# EAGLE board Whale_Engine-REVB_eagle (EAGLE 9.5.2)
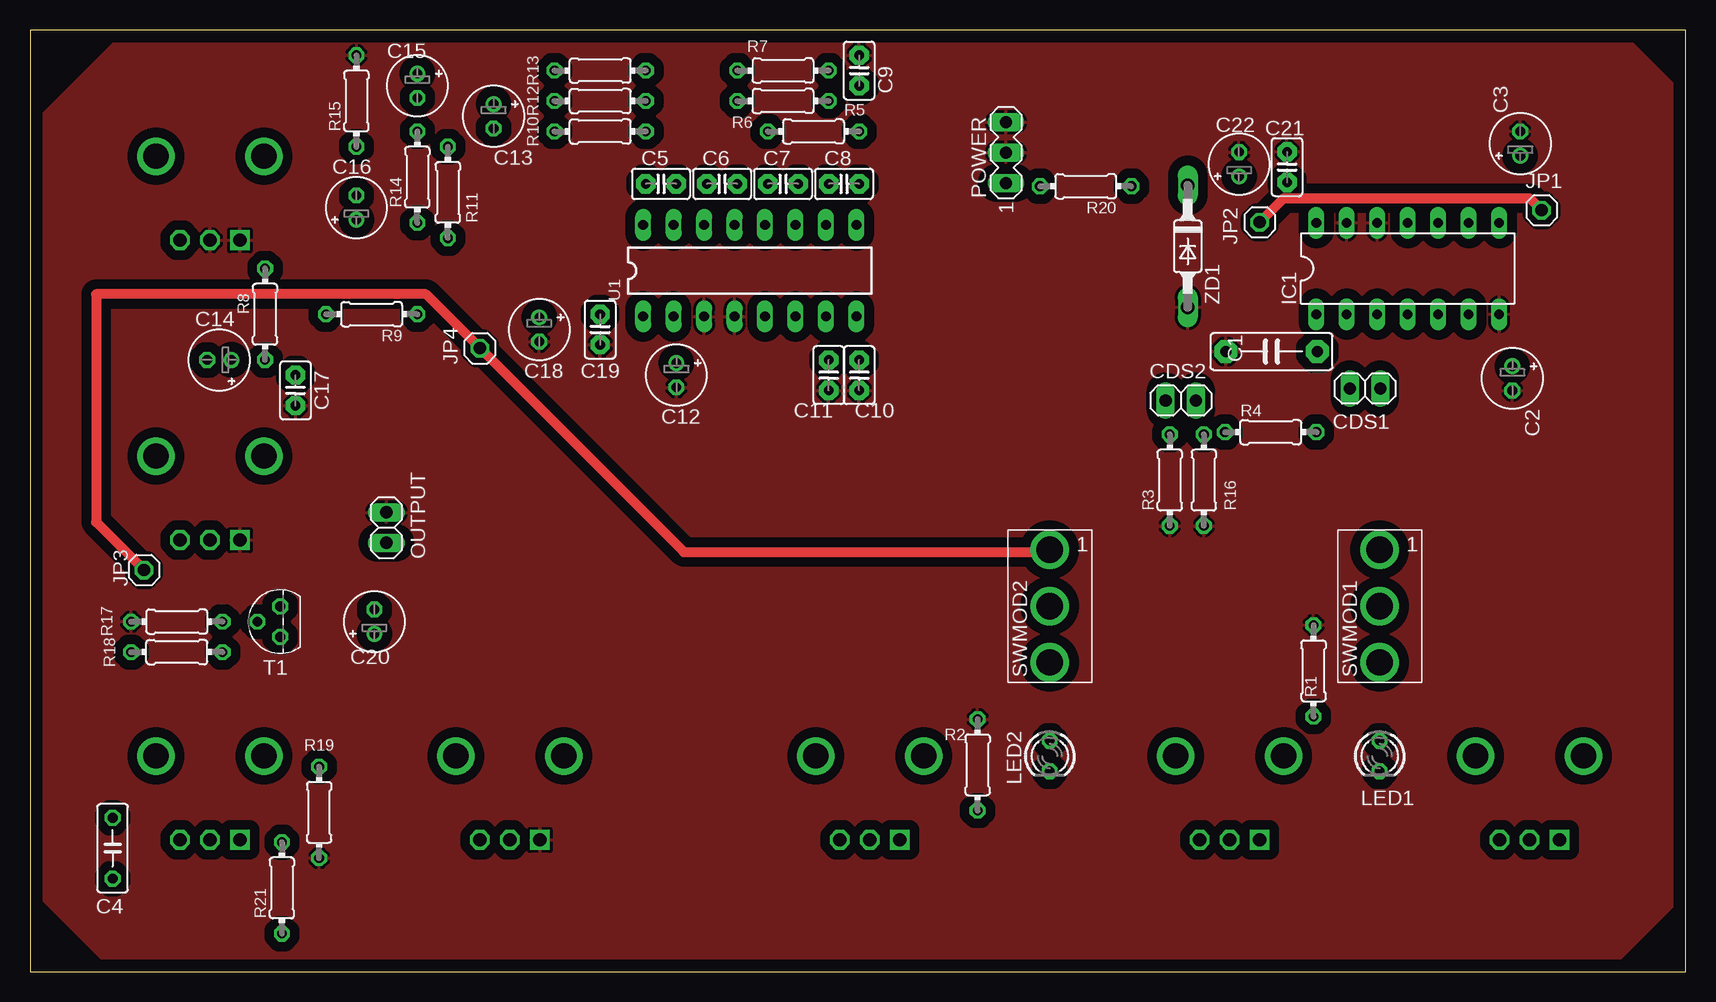
[diagram p0: board, top side]
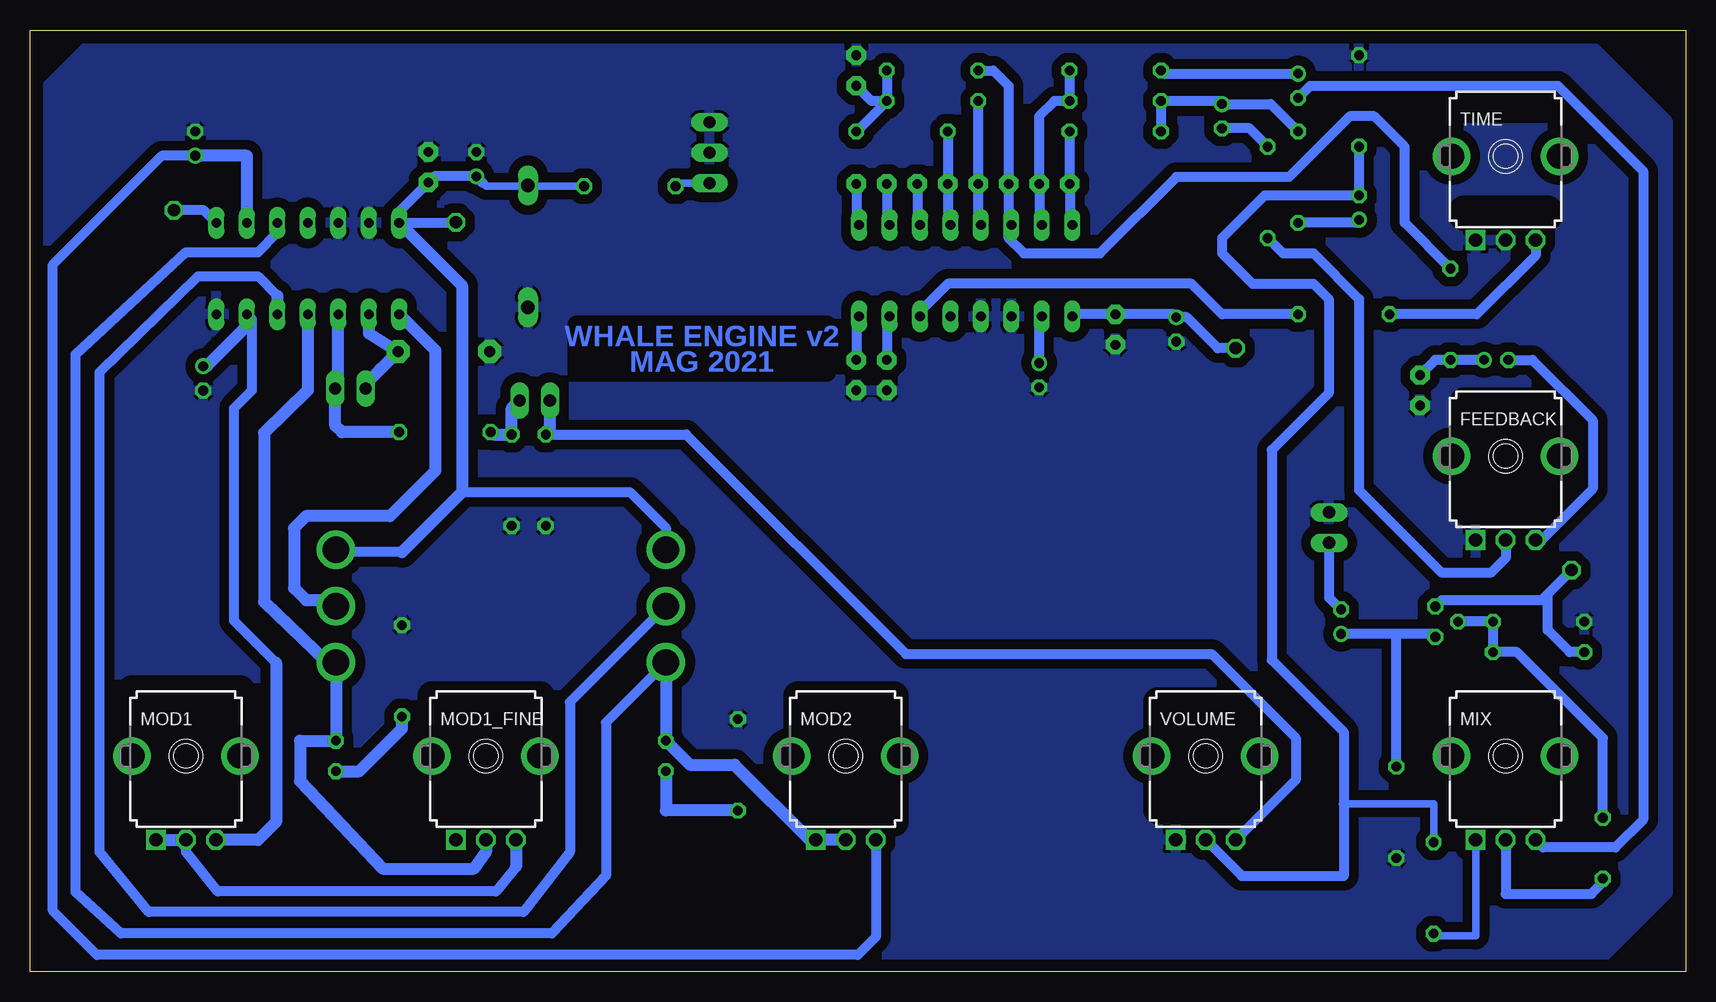
[diagram p1: board, bottom side, seen from below]

Size 138 x 78.53 mm. Coordinates in mm from the lower left corner, seen from the top.
Outline: 0,0 138,0 138,78.53 0,78.53 0,0
Copper layers (1*16): Top 0.035mm / dielectric 1.5mm / Bottom 0.035mm
Design rules "default": minimum track width 6mil, minimum drill 0.35mm, track to track 6mil, track to pad 6mil, pad to pad 6mil, via to via 6mil, smd to smd 6mil, copper to edge 40mil, drill to drill 6mil, minimum pad ring 10mil, minimum via ring 8mil, stop-mask expansion 4mil, vias tented up to drill 0mil, thermal gap 10mil
bRestrict: area 120.5,12.5 to 129.5,23.5; area 95.5,12.5 to 104.5,23; area 66,12.5 to 74,23; area 36,13.5 to 44,22.5; area 11,12.5 to 19,23; area 11,38.5 to 18.5,47.5; area 11.5,63 to 18.5,63.5; area 11,72 to 19,72.5

## Footprints (pad centres in the part's own frame; a part is rotated, then mirrored left to right if it is on the bottom)
C7.5B3 = drill 0.914 pad 1.905 octagon: 1 -3.81,0; 2 3.81,0
E2-5 = drill 0.813 pad 1.27: + -1.016,0 | drill 0.813 pad 1.27 octagon: - 1.016,0
C050-025X075 = drill 0.813 octagon: 1 -2.54,0; 2 2.54,0
C2.5-2 = drill 0.813 pad 1.6 octagon: 1 -1.27,0; 2 1.27,0
1X02 = drill 1.016 long: 1 -1.27,0; 2 1.27,0
9MM_SNAP-IN_POT = drill 1.1 square: 1 -2.5,-7 | drill 1.1 octagon: 2 0,-7; 3 2.5,-7 | drill 2.1 pad 2.794: CHASSIS1 -4.5,0; CHASSIS2 4.5,0
DIL14 = drill 0.813 long: 1 -7.62,-3.81; 2 -5.08,-3.81; 3 -2.54,-3.81; 4 0,-3.81; 5 2.54,-3.81; 6 5.08,-3.81; 7 7.62,-3.81; 8 7.62,3.81; 9 5.08,3.81; 10 2.54,3.81; 11 0,3.81; 12 -2.54,3.81; 13 -5.08,3.81; 14 -7.62,3.81
1X01 = drill 1.016 octagon: 1 0,0
LED3MM = drill 0.813 octagon: A -1.27,0; K 1.27,0
MA03-1 = drill 1.016 long: 1 -2.54,0; 2 0,0; 3 2.54,0
0204/7 = drill 0.813 octagon: 1 -3.81,0; 2 3.81,0
C&K_SPDT_PCB = drill 2.2: P$1 0,4.7; P$2 0,0; P$3 0,-4.7
TO92 = drill 0.813 octagon: 1 1.27,0; 2 0,1.905; 3 -1.27,0
DIL16 = drill 0.813 long: 1 -8.89,-3.81; 2 -6.35,-3.81; 3 -3.81,-3.81; 4 -1.27,-3.81; 5 1.27,-3.81; 6 3.81,-3.81; 7 6.35,-3.81; 8 8.89,-3.81; 9 8.89,3.81; 10 6.35,3.81; 11 3.81,3.81; 12 1.27,3.81; 13 -1.27,3.81; 14 -3.81,3.81; 15 -6.35,3.81; 16 -8.89,3.81
SOD81 = drill 1.118 long: A 5.08,0; C -5.08,0

## Placement (x,y rotation side)
C1  470nF  [C7.5B3]  103.49,51.72 180 top
C2  10uF  [E2-5]  123.56,49.48 270 top
C3  47uF  [E2-5]  124.22,69.06 90 top
C4  100nF  [C050-025X075]  6.89,10.31 90 top
C5  560pF  [C2.5-2]  52.6,65.7 0 top
C6  560pF  [C2.5-2]  57.69,65.7 0 top
C7  47nF  [C2.5-2]  62.77,65.7 0 top
C8  47nF  [C2.5-2]  67.85,65.7 0 top
C9  3.3nF  [C2.5-2]  69.12,75.15 90 top
C10  100nF  [C2.5-2]  69.12,49.75 270 top
C11  100nF  [C2.5-2]  66.58,49.75 270 top
C12  47uF  [E2-5]  53.88,49.75 270 top
C13  47uF  [E2-5]  38.64,71.34 270 top
C14  10uF  [E2-5]  15.78,51.02 180 top
C15  10uF  [E2-5]  32.29,73.88 270 top
C16  4.7uF  [E2-5]  27.21,63.72 90 top
C17  1nF  [C2.5-2]  22.13,48.48 270 top
C18  100uF  [E2-5]  42.45,53.56 270 top
C19  100nF  [C2.5-2]  47.53,53.56 90 top
C20  10uF  [E2-5]  28.71,29.2 90 top
C21  100nF  [C2.5-2]  104.79,67.1 90 top
C22  100uF  [E2-5]  100.79,67.34 90 top
CDS1  [1X02]  111.28,48.64 0 top
CDS2  [1X02]  95.93,47.64 0 top
FEEDBACK  10K  [9MM_SNAP-IN_POT]  15,43 0 bottom
IC1  4093N  [DIL14]  114.84,58.64 0 top
JP1  [1X01]  126,63.5 0 top
JP2  [1X01]  102.5,62.5 0 top
JP3  [1X01]  9.5,33.5 0 top
JP4  [1X01]  37.5,52 90 top
LED1  [LED3MM]  112.5,18 270 top
LED2  [LED3MM]  85,18 270 top
MIX  10-50K  [9MM_SNAP-IN_POT]  15,18 0 bottom
MOD1  100K  [9MM_SNAP-IN_POT]  125,18 0 bottom
MOD1_FINE  5K  [9MM_SNAP-IN_POT]  100,18 0 bottom
MOD2  100K  [9MM_SNAP-IN_POT]  70,18 0 bottom
OUTPUT  [1X02]  29.71,37.05 90 top
POWER  [MA03-1]  81.36,68.31 90 top
R1  1K  [0204/7]  106.99,25.1 270 top
R2  1K  [0204/7]  78.99,17.26 270 top
R3  22K  [0204/7]  95.01,41 90 top
R4  68k  [0204/7]  103.42,45 0 top
R5  10k  [0204/7]  65.31,70.07 180 top
R6  10k  [0204/7]  62.77,72.61 180 top
R7  15K  [0204/7]  62.77,75.15 180 top
R8  5.6K  [0204/7]  19.59,54.83 90 top
R9  2k  [0204/7]  28.48,54.83 180 top
R10  10k  [0204/7]  47.53,70.07 0 top
R11  5K  [0204/7]  34.83,64.99 90 top
R12  10k  [0204/7]  47.53,72.61 0 top
R13  4.7K  [0204/7]  47.53,75.15 0 top
R14  15K  [0204/7]  32.29,66.26 90 top
R15  100K  [0204/7]  27.21,72.61 90 top
R16  22K  [0204/7]  97.85,41 90 top
R17  220K  [0204/7]  12.24,29.2 180 top
R18  220K  [0204/7]  12.24,26.66 0 top
R19  3K3  [0204/7]  24.1,13.3 270 top
R20  100R  [0204/7]  88,65.5 180 top
R21  2-10K  [0204/7]  21,7 90 top
SWMOD1  SPDT_C&K_PCB  [C&K_SPDT_PCB]  112.5,30.5 0 top
SWMOD2  SPDT_C&K_PCB  [C&K_SPDT_PCB]  85,30.5 0 top
T1  2N3904  [TO92]  20.86,29.2 90 top
TIME  50K  [9MM_SNAP-IN_POT]  15,68 0 bottom
U1  PT2399  [DIL16]  60,58.46 0 top
VOLUME  10KA  [9MM_SNAP-IN_POT]  40,18 0 bottom
ZD1  4.7V Zener  [SOD81]  96.5,60.5 270 top

## Library data of the parts
C1 C5-C11 C17 C19 C21 = capacitor-wima
C2-C4 C12-C16 C18 C20 C22 = rcl; SPICEPREFIX: C
CDS1 CDS2 JP1-JP4 OUTPUT = pinhead
FEEDBACK MIX MOD1 MOD1_FINE MOD2 TIME VOLUME = MusicThingModular
IC1 = 40xx
LED1 LED2 = led
POWER = con-lstb; OC_FARNELL: unknown; OC_NEWARK: unknown
R1-R21 = rcl; SPICEPREFIX: R
SWMOD1 SWMOD2 = DACS
T1 = transistor
U1 = princeton-tech
ZD1 = diode

## Nets
+5V: C18.+ C19.2 C21.1 C22.+ IC1.8 IC1.14 JP1.1 JP2.1 JP3.1 JP4.1 R18.1 R20.1 SWMOD1.P$1 SWMOD2.P$1 T1.1 U1.1 ZD1.C
GND: C1.2 C2.- C3.- C9.2 C10.2 C11.2 C12.- C17.2 C18.- C19.1 C21.2 C22.- FEEDBACK.1 IC1.7 IC1.12 IC1.13 OUTPUT.2 POWER.2 POWER.3 R1.1 R2.1 R3.1 R15.2 R16.1 R17.2 R19.2 TIME.1 TIME.2 U1.3 U1.4 VOLUME.1 ZD1.A
N$1: IC1.1 SWMOD1.P$2
N$2: IC1.5 SWMOD2.P$2
N$3: C2.+ IC1.6 MOD1.3
N$4: MOD1.1 MOD1.2 MOD1_FINE.3
N$5: IC1.4 LED1.A MOD1_FINE.2 SWMOD1.P$3
N$6: IC1.10 LED2.A MOD2.1 MOD2.2 SWMOD2.P$3
N$7: C1.1 CDS1.1 IC1.2
N$8: CDS1.2 IC1.3 R4.2
N$9: LED1.K R1.2
N$10: LED2.K R2.2
N$11: C3.+ IC1.9 MOD2.3
N$12: CDS2.2 R4.1 R16.2
N$13: CDS2.1 R3.2 VOLUME.3
N$14: C5.1 R10.2 U1.16
N$15: C5.2 R12.2 R13.2 U1.15
N$16: C6.1 R7.2 R8.2 U1.14
N$17: C6.2 R6.2 U1.13
N$18: C7.1 R5.2 U1.12
N$19: C7.2 U1.11
N$20: C8.1 U1.10
N$21: C8.2 U1.9
N$22: C9.1 R5.1 R6.1 R7.1
N$23: C10.1 U1.8
N$24: C11.1 U1.7
N$25: R9.1 U1.6
N$26: R9.2 TIME.3
N$27: C4.2 R17.1 R18.2 T1.2
N$28: C12.+ U1.2
N$29: C13.+ R10.1 R12.1 R14.2
N$30: C13.- R11.2
N$31: FEEDBACK.2 R11.1
N$32: C14.- FEEDBACK.3
N$33: C14.+ C17.1 R8.1
N$34: C15.+ R13.1
N$35: C4.1 MIX.2
N$36: C16.+ R14.1
N$37: C20.+ R19.1 T1.3
N$38: C20.- OUTPUT.1
N$39: C15.- MIX.3
N$40: MIX.1 R21.1
N$41: POWER.1 R20.2
OSC_OUT: C16.- R15.1 R21.2 VOLUME.2

## Tracks (layer width: path | path; a pad name or v marks a point on that pad's centre or on a via)
+5V
  Top 0.813: JP3.1 5.5,37.5 5.5,56.5 33,56.5 JP4.1 54.5,35 84.8,35 SWMOD2.P$1 | JP2.1 104.5,64.5 125,64.5 JP1.1
  Bottom 0.61: R20.1 96.42,65.5 | 96.42,65.5 ZD1.C | 100.24,65.77 99.97,65.5 96.42,65.5
  Bottom 0.813: U1.1 50.93,54.83 C19.2 42.7,54.83 C18.+ 41.58,54.58 39,52 JP4.1 | JP2.1 102.55,62.45 IC1.14 107.22,63.4 C21.1 104.3,66.32 C22.+ 100.24,65.77 | IC1.8 123.51,63.5 JP1.1 | T1.1 20.33,31 12,31 JP3.1 11.5,31.5 11.5,28.5 9.66,26.66 R18.1 | 107,35 112.3,35 SWMOD1.P$1 | 102,40 88,40 85,37 SWMOD2.P$1
  Bottom 1.016: IC1.14 102,57.23 102,40 107,35
GND
  pour Bottom (isolate 0.813): 7.5,77 1.5,71 1.5,6.5 7,1 132.5,1 136.5,5 136.5,74 133.5,77
  pour Top (isolate 0.813): 1,71 1,71.5 7,77.5 133.5,77.5 137,74 137,5.5 132.5,1 6,1 1,6 1,6.5
N$1
  Bottom 1.016: IC1.1 104.22,51.83 104.22,41.78 108,38 115,38 116,37 116,32 115,31 113,31 SWMOD1.P$2
N$2
  Bottom 0.813: 117.38,56.38 119,58 124,58 132.2,50 132.2,10 128.09,5 96.86,5 93,10 93,22.5 SWMOD2.P$2
  Bottom 1.016: 117.38,56.38 IC1.5
N$3
  Bottom 0.813: 117.5,25.77 121,29.27 121,47 119.5,48.5 119.5,54.41 IC1.6
  Bottom 1.016: IC1.6 119.92,53.83 123.25,50.5 C2.+ | 117.5,25.77 117.5,12.5 119,11 MOD1.3
N$4
  Bottom 0.813: 97.5,8.76 99.16,6.7 122.34,6.7 125,10 MOD1.2
  Bottom 1.016: MOD1.1 MOD1.2 | MOD1_FINE.3 97.5,8.76
N$5
  Bottom 1.016: IC1.4 114.84,48.48 118.48,44.94 118.48,30.87 113.17,25.8 SWMOD1.P$3 LED1.A 115.5,19.27 115.5,15.9 108.6,8.6 101,8.6 100,10 MOD1_FINE.2
N$6
  Bottom 0.813: SWMOD2.P$3 90,20.8 90,8 94.5,3.2 130.4,3.2 134.2,6.67 134.2,51.47 125,60 119,60 117.38,61.62 IC1.10
  Bottom 1.016: SWMOD2.P$3 LED2.A 83,17.27 79.27,17.27 73,11 MOD2.1 MOD2.2
N$7
  Bottom 1.016: IC1.2 109.76,53.24 C1.1 108.78,50.26 110.01,49.03 CDS1.1
N$8
  Bottom 1.016: IC1.3 112.3,48.89 CDS1.2 112.55,45.55 112,45 R4.2
N$9
  Bottom 1.016: LED1.K 110.55,16.73 106.99,20.29 R1.2
N$10
  Bottom 1.016: R2.2 85,13.45 LED2.K
N$11
  Bottom 0.813: MOD2.3 67.5,2.92 69,1.42 132.42,1.42 136.1,5.1 136.1,58.96 127.01,68.04 C3.+
  Bottom 1.016: IC1.9 119.92,68.04 C3.+
N$12
  Bottom 1.016: R4.1 99.42,44.81 R16.2 97.85,46.99 CDS2.2
N$13
  Bottom 0.813: R3.2 83.31,44.81 65,26.5 39.5,26.5 32.5,19.5 32.5,16 VOLUME.3
  Bottom 1.016: R3.2 94.66,45.16 CDS2.1
N$14
  Bottom 0.813: U1.16 51.33,62.49 C5.1 R10.2
N$15
  Bottom 0.813: U1.15 53.87,62.49 C5.2 53.88,71.34 52.61,72.61 R12.2 R13.2
N$16
  Bottom 0.813: 56.42,62.5 C6.1 56.42,73.88 57.69,75.15 R7.2 | 56.42,62.5 U1.14 | 56.42,62.5 56.42,61.18 55.15,59.91 48.8,59.91 42.45,66.26 33.06,66.26 27.98,71.34 25.94,71.34 23.4,68.8 23.4,62.45 R8.2
N$17
  Bottom 0.813: U1.13 58.96,62.5 C6.2 R6.2
N$18
  Bottom 0.813: U1.12 61.5,62.5 C7.1 R5.2
N$19
  Bottom 0.813: C7.2 64.04,62.5 U1.11
N$20
  Bottom 0.813: C8.1 66.58,62.5 U1.10
N$21
  Bottom 0.813: C8.2 69.12,62.5 U1.9
N$22
  Bottom 0.813: R6.1 R5.1 | R7.1 R6.1 | R6.1 67.85,72.61 C9.1
N$23
  Bottom 0.813: U1.8 69.12,54.42 C10.1
N$24
  Bottom 0.813: U1.7 66.58,54.42 C11.1
N$25
  Bottom 0.813: R9.1 38.64,54.83 41.18,57.37 61.5,57.37 63.81,55.06 U1.6
N$26
  Bottom 0.813: TIME.3 12.5,59.73 17.4,54.83 R9.2
N$27
  Bottom 0.813: C4.2 6.89,19.5 14.05,26.66 R18.2 R17.1 T1.2
N$28
  Bottom 0.813: U1.2 53.88,54.42 C12.+
N$29
  Bottom 0.813: R10.1 R12.1 38.89,72.61 C13.+ 34.58,72.36 R14.2
N$30
  Bottom 0.813: R11.2 36.35,70.32 C13.-
N$31
  Bottom 0.813: R11.1 33.56,59.91 31.02,59.91 27.21,56.1 27.21,40.17 20.36,33.32 16.18,33.32 15,34.5 FEEDBACK.2
N$32
  Bottom 0.813: C14.- 12.76,51.02 7.74,46 7.74,40.26 12,36 FEEDBACK.3
N$33
  Bottom 0.813: C14.+ R8.1 20.86,51.02 C17.1
N$34
  Bottom 0.813: R13.1 43.47,74.9 C15.+
N$35
  Bottom 0.813: C4.1 6.89,7.46 7.85,6.5 15,6.5 MIX.2
N$36
  Bottom 0.813: C16.+ 27.46,62.45 R14.1
N$37
  Bottom 0.813: T1.3 21.11,28.18 24,28.18 | 24,28.18 C20.+ | R19.1 24.1,28.08 24,28.18
N$38
  Bottom 0.813: OUTPUT.1 29.71,31.22 C20.-
N$39
  Bottom 0.61: 11.88,10.38 MIX.3
  Bottom 0.813: C15.- 31.29,73.86 10.64,73.86 3.54,66.76 3.54,12.69 5.85,10.38 11.88,10.38
N$40
  Bottom 0.61: MIX.1 17.5,3 20.81,3 R21.1
N$41
  Bottom 0.61: POWER.1 83.92,65.77 R20.2
OSC_OUT
  Bottom 0.61: R21.2 21,14 28.5,14
  Bottom 0.813: VOLUME.2 37,8 28.5,8 28.5,14 28.5,20 34.5,26 34.5,43.53 29.75,48.28 29.75,56.1 31.02,57.37 36.1,57.37 38.64,59.91 38.64,61.18 35.08,64.74 C16.- R15.1

## Text on the board
Bottom: WHALE ENGINE v2 / MAG 2021